# Altium PCB EEG.PcbDoc
Units mil, origin at the board's own origin, x right, y up, seen from the top; angles counter-clockwise.
Board outline 2755.91 x 1771.65 mil, 2 copper layers (Top Layer, Bottom Layer), stack 12.8 mil thick; 57 components, 41 nets, 212 pads, 175 vias.
Unrouted connection lines stored in the file: 37.
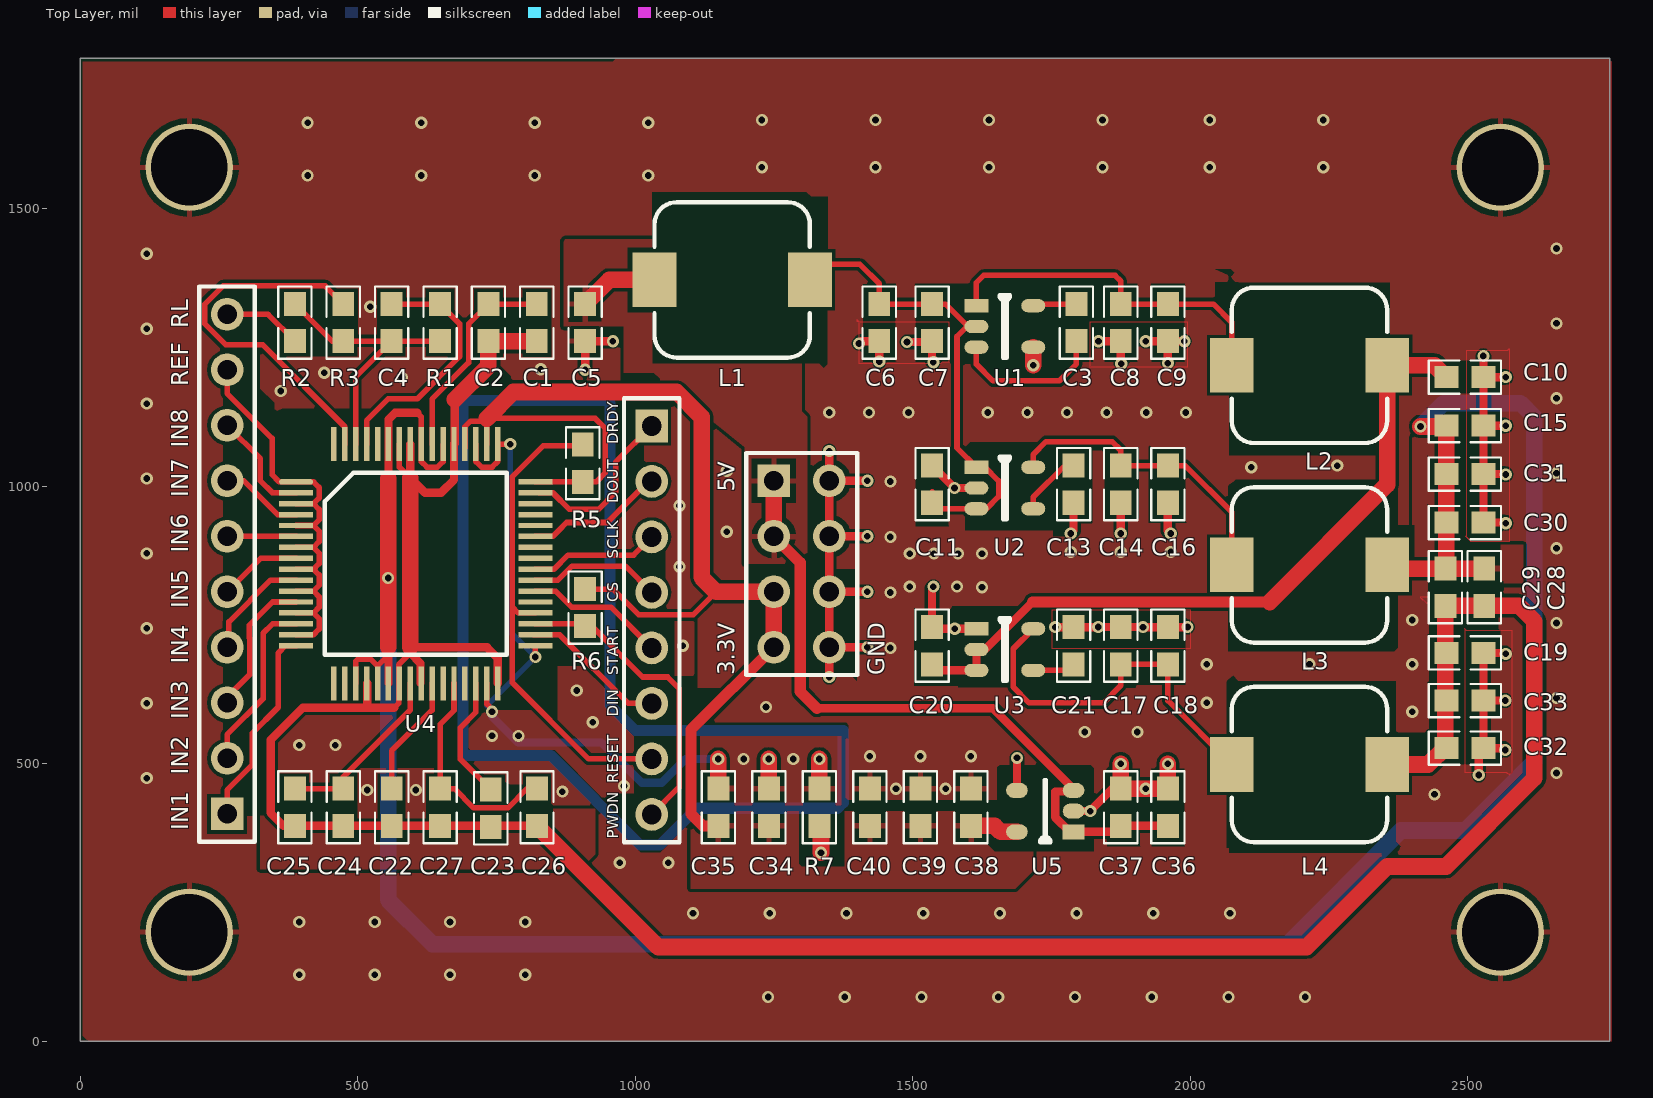
[diagram p0: Top Layer view]
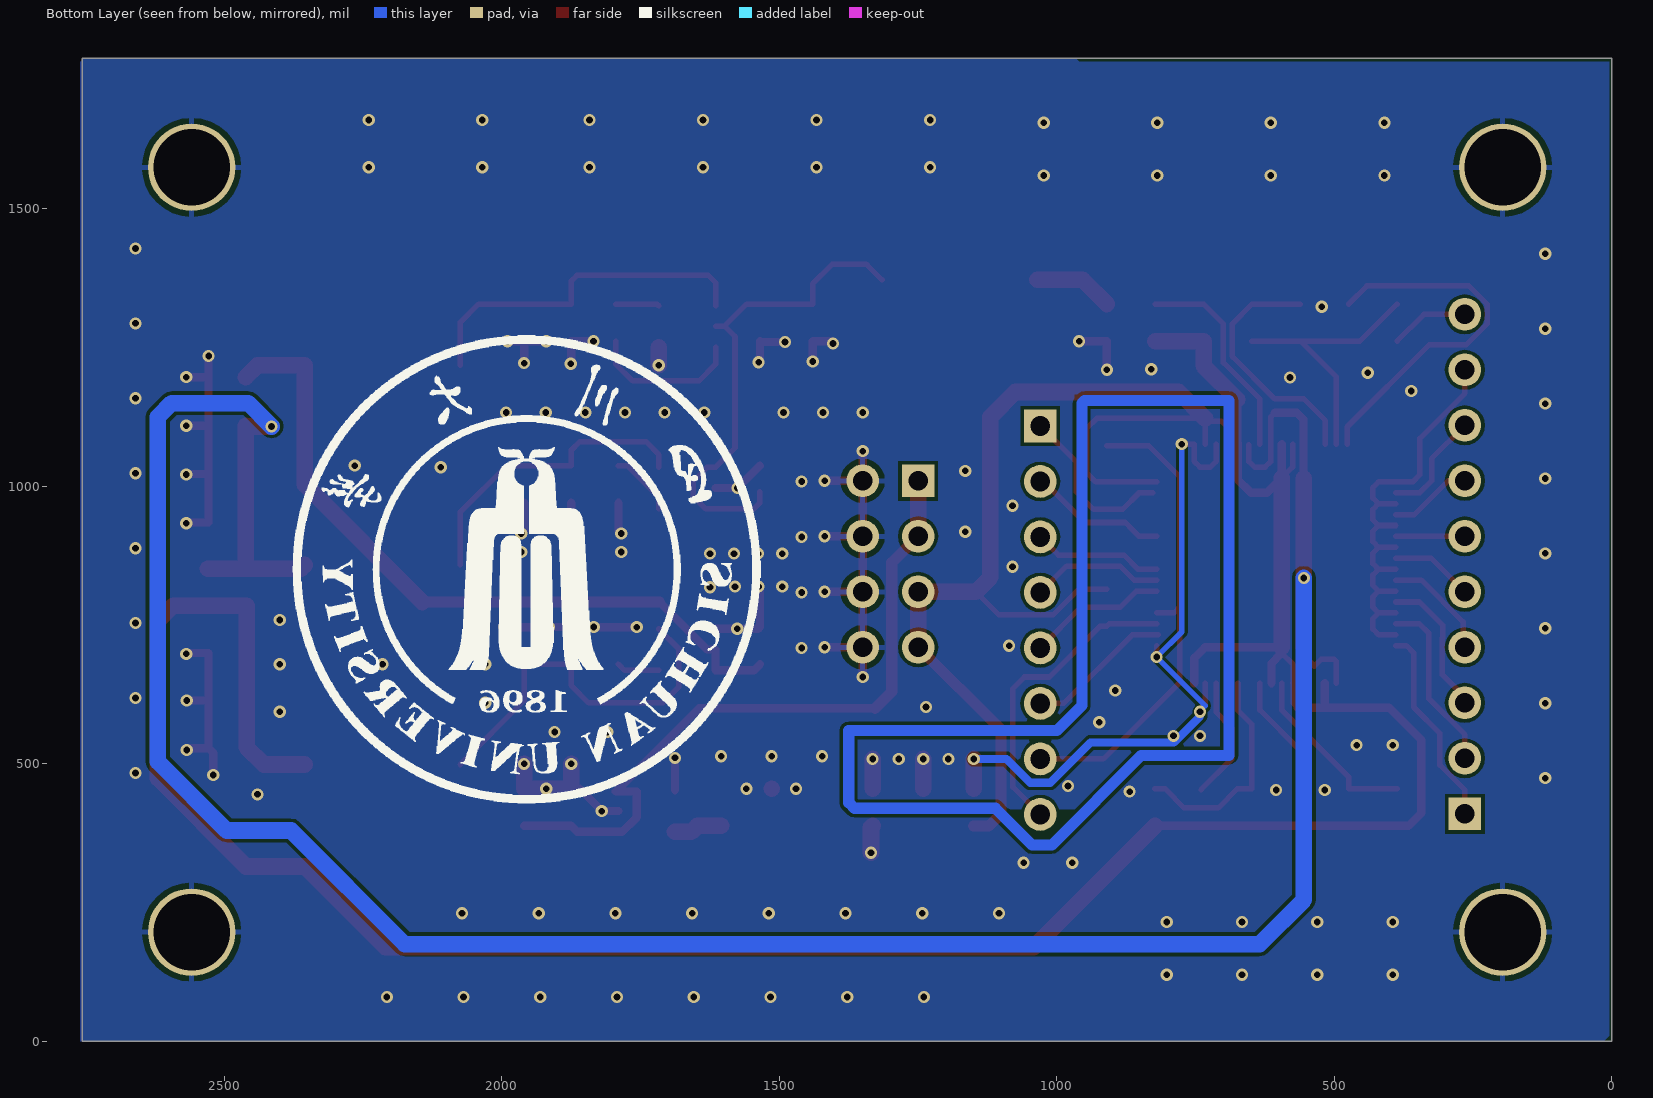
[diagram p1: Bottom Layer view, seen from below]

## Layer stack, top to bottom
Top Solder: solder mask 0.4, Solder Resist, Dk 3.5
Top Layer: signal copper 1.4
Dielectric 1: core 10, FR-4, Dk 4.2
Bottom Layer: signal copper 1.4
Bottom Solder: solder mask 0.4, Solder Resist, Dk 3.5

## Board outline
0,0 2755.91,0 2755.91,1771.65 0,1771.65

## Design rules (kind name [scope] priority, off if disabled: settings)
Clearance [All] p1: gap=6 ignorepadtopadclearanceinfootprint=TRUE
HoleSize [All] p1: absolutevalues=TRUE maxlimit=196.85 minlimit=11.81 maxpercent=80.000 minpercent=20.000
PlaneClearance [All] p1: clearance=8
PlaneConnect [All] p1: planeconnectstyle=Direct reliefexpansion=20 reliefentries=4 reliefconductorwidth=10 reliefairgap=10
PolygonConnect [All] p1: thpad.connectstyle=Relief thpad.reliefconductorwidth=10 thpad.reliefentries=4 thpad.polygonreliefangle="90 Angle" thpad.airgapwidth=10 smdpad.connectstyle=Relief smdpad.reliefconductorwidth=10 smdpad.reliefentries=4 smdpad.polygonreliefangle="90 Angle" smdpad.airgapwidth=10 via.connectstyle=Direct via.reliefconductorwidth=10 via.reliefentries=4 via.polygonreliefangle="90 Angle" via.airgapwidth=10
RoutingVias [All] p1: holewidth=12 width=22 viastyle="Through Hole" minholewidth=12 minwidth=22 maxholewidth=12 maxwidth=22
SilkToSilkClearance [All] p1: silktosilkclearance=6
SilkToSolderMaskClearance [IsPad] p1: minsilkscreentomaskgap=2 clearancetoexposedcopper=TRUE
SolderMaskExpansion [All] p1: expansion=4
Width PWR [InNetClass('PWR')] p1: maxlimit=30 minlimit=10 preferedwidth=15
Width [All] p2: maxlimit=30 minlimit=6 preferedwidth=10
25 further rules are at their usual default settings.

## Classes and differential pairs
net class PWR: +5V -5V AGND AVDD AVSS DGND DVDD
component class EEG: C1 C2 C3 C4 C5 C6 C7 C8 C9 C10 C11 C13 C14 C15 C16 C17 C18 C19 C20 C21 C22 C23 C24 C25 C26 C27 C28 C29 C30 C31 C32 C33 C34 C35 C36 C37 C38 C39 C40 L1 L2 L3 L4 R1 R2 R3 R5 R6 R7 U1 U2 U3 U4 U5

## Components (designator, comment, footprint, x,y, rotation, side; value= is the part's Value field where it differs from the comment)
C1 "Cap" 0603-1 822.84,1295 r90 top value=1u
C2 "Cap" 0603-1 735.69,1295 r90 top value=0.1u
C3 "Cap" 0603-1 1795,1295 r90 top value=1u
C4 "Cap" 0603-1 561.37,1295 r90 top value=0.01u
C5 "Cap Pol1" 0603-1 910,1295 r270 top value=10u
C6 "Cap Pol1" 0603-1 1440,1295 r270 top value=10u
C7 "Cap" 0603-1 1535,1295 r90 top value=1u
C8 "Cap Pol1" 0603-1 1875,1295 r90 top value=10u
C9 "Cap" 0603-1 1960,1295 r90 top value=1u
C10 "Cap Pol1" 0603-1 2495,1196.81 r180 top value=10u
C11 "Cap" 0603-1 1535,1003.95 r270 top value=1u
C13 "Cap" 0603-1 1790,1003.95 r270 top value=1u
C14 "Cap Pol1" 0603-1 1875,1003.95 r270 top value=10u
C15 "Cap Pol1" 0603-1 2495,1109.49 r0 top value=10u
C16 "Cap" 0603-1 1960,1003.95 r90 top value=2.2u
C17 "Cap Pol1" 0603-1 1875,712.9 r270 top value=10u
C18 "Cap" 0603-1 1960,712.9 r270 top value=2.2u
C19 "Cap Pol1" 0603-1 2495,699.84 r180 top value=10u
C20 "Cap Pol1" 0603-1 1535,712.9 r270 top value=10u
C21 "Cap" 0603-1 1790,712.9 r270 top value=0.01u
C22 "Cap" 0603-1 561.54,421.85 r90 top value=1u
C23 "Cap" 0603-1 740,420 r90 top value=1u
C24 "Cap" 0603-1 474.3,421.85 r90 top value=10u
C25 "Cap" 0603-1 387.06,421.85 r90 top value=0.1u
C26 "Cap Pol2" 0603-1 823.25,421.85 r270 top value=100u
C27 "Cap" 0603-1 648.78,421.85 r90 top value=1u
C28 "Cap" 0603-1 2530,818.31 r270 top value=1u
C29 "Cap" 0603-1 2460,818.31 r270 top value=0.1u
C30 "Cap" 0603-1 2495,934.84 r0 top value=10u
C31 "Cap" 0603-1 2495,1022.16 r0 top value=0.1u
C32 "Cap" 0603-1 2495,528.31 r0 top value=10u
C33 "Cap" 0603-1 2495,614.07 r0 top value=0.1u
C34 "Cap" 0603-1 1241,421.85 r90 top value=10u
C35 "Cap" 0603-1 1150,421.85 r90 top value=0.1u
C36 "Cap" 0603-1 1960,421.85 r90 top value=22u
C37 "Cap" 0603-1 1875,421.85 r90 top value=22u
C38 "Cap" 0603-1 1605,421.85 r90 top value=22u
C39 "Cap" 0603-1 1514,421.85 r90 top value=22u
C40 "Cap" 0603-1 1423,421.85 r90 top value=100n
L1 "Inductor" L-SMD-7 1175,1371.97 r0 top value=3.3uH
L2 "Inductor" L-SMD-7 2215,1218.03 r0 top value=3.3uH
L3 "Inductor" L-SMD-7 2215,858.42 r0 top value=3.3uH
L4 "Inductor" L-SMD-7 2215,498.82 r0 top value=3.3uH
P1 "Header 8" HDR1X8 1030,1108.82 r270 top
P2 "Header 10" HDR1X10 265,410 r90 top
P3 "Header 4X2" HDR2X4 1250,1010 r270 top
R1 "Res1" 0603-1 648.53,1295 r90 top value=391k
R2 "Res1" 0603-1 387.06,1295 r90 top value=100k
R3 "Res1" 0603-1 474.22,1295 r90 top value=0
R5 "Res1" 0603-1 905.79,1041.65 r270 top value=10k
R6 "Res1" 0603-1 910,781.54 r270 top value=10k
R7 "Res1" 0603-1 1332,421.85 r270 top value=0
U1 "TPS60403" tps723/732/60403 1615,1325.47 r0 top
U2 "TPS73225" tps723/732/60403 1615,1034.42 r0 top
U3 "TPS72325" tps723/732/60403 1615,743.37 r0 top
U4 "ADS1299" ADS1299 389.29,1008.19 r0 top
U5 "SPX5205" SPX5205 1790,377.52 r180 top

## Footprints (in the part's own frame and the unit in brackets; to place one, negate y for a bottom-side part, rotate by r counter-clockwise, add the part's x,y. Pads: shape width x height; smd on the part's side, far side on the other; paste and mask are expansions set on the pad)
0603-1 [mm]
  rect 1.1x1 smd: 1(-0.85,0) 2(0.85,0)
  silkscreen extent -1.65,-0.76 1.65,0.76, body extent -1.14,-0.38 1.14,0.38, height 1
ADS1299 [mm]
  oval 1.55x0.25 smd: 1(0,0)
  rect 1.55x0.25 smd: 2(0,-0.5) 3(0,-1) 4(0,-1.5) 5(0,-2) 6(0,-2.5) 7(0,-3) 8(0,-3.5) 9(0,-4) 10(0,-4.5) 11(0,-5) 12(0,-5.5) 13(0,-6) 14(0,-6.5) 15(0,-7) 16(0,-7.5) 33(10.95,-7.5) 34(10.95,-7) 35(10.95,-6.5) 36(10.95,-6) 37(10.95,-5.5) 38(10.95,-5) 39(10.95,-4.5) 40(10.95,-4) 41(10.95,-3.5) 42(10.95,-3) 43(10.95,-2.5) 44(10.95,-2) 45(10.95,-1.5) 46(10.95,-1) 47(10.95,-0.5) 48(10.95,0)
  rect 0.25x1.55 smd: 17(1.725,-9.225) 18(2.225,-9.225) 19(2.725,-9.225) 20(3.225,-9.225) 21(3.725,-9.225) 22(4.225,-9.225) 23(4.725,-9.225) 24(5.225,-9.225) 25(5.725,-9.225) 26(6.225,-9.225) 27(6.725,-9.225) 28(7.225,-9.225) 29(7.725,-9.225) 30(8.225,-9.225) 31(8.725,-9.225) 32(9.225,-9.225) 49(9.225,1.725) 50(8.725,1.725) 51(8.225,1.725) 52(7.725,1.725) 53(7.225,1.725) 54(6.725,1.725) 55(6.225,1.725) 56(5.725,1.725) 57(5.225,1.725) 58(4.725,1.725) 59(4.225,1.725) 60(3.725,1.725) 61(3.225,1.725) 62(2.725,1.725) 63(2.225,1.725) 64(1.725,1.725)
  silkscreen extent 1.31,-7.92 9.64,0.42
HDR1X8 [mm] "Connector; Header; 8 Position"
  rect 1.5x1.5 hole 0.9: 1(0,0)
  round 1.5 hole 0.9: 2(2.54,0) 3(5.08,0) 4(7.62,0) 5(10.16,0) 6(12.7,0) 7(15.24,0) 8(17.78,0)
  silkscreen extent -1.27,-1.27 19.05,1.27
HDR1X10 [mm] "Connector; Header; 10 Position"
  rect 1.5x1.5 hole 0.9: 1(0,0)
  round 1.5 hole 0.9: 2(2.54,0) 3(5.08,0) 4(7.62,0) 5(10.16,0) 6(12.7,0) 7(15.24,0) 8(17.78,0) 9(20.32,0) 10(22.86,0)
  silkscreen extent -1.27,-1.27 24.13,1.27
HDR2X4 [mm] "Connector; Header; 4x2 Position"
  rect 1.5x1.5 hole 0.9: 1(0,0)
  round 1.5 hole 0.9: 2(0,2.54) 3(2.54,0) 4(2.54,2.54) 5(5.08,0) 6(5.08,2.54) 7(7.62,0) 8(7.62,2.54)
  silkscreen extent -1.27,-1.27 8.89,3.81
L-SMD-7 [mm] "贴片电感7*7"
  rect 2x2.5 smd: 1(-3.556,0) 2(3.556,0)
  silkscreen extent -3.56,-3.56 3.56,3.56, body extent -3.56,-3.56 3.56,3.56, height 4
SPX5205 [mm]
  rect 0.99x0.69 smd: 1(0,0)
  oval 0.99x0.69 smd: 2(0,-0.95) 3(0,-1.9) 4(2.59,-1.9) 5(2.59,0)
  silkscreen extent 1.06,-2.37 1.53,0.48
tps723/732/60403 [mm]
  rect 1.1x0.6 smd: 1(0,0)
  oval 1.1x0.6 smd: 2(0,-0.95) 3(0,-1.9) 4(2.6,-1.9) 5(2.6,0)
  silkscreen extent 1.06,-2.37 1.54,0.48

## Part data
C1 C2 C3 C4 C7 C9 C11 C13 C16 C18 C21 C22 C23 C24 C25 C27 C28 C29 C30 C31 C32 C33 C34 C35 C36 C37 C38 C39 C40: "Capacitor", LatestRevisionDate=17-Jul-2002, LatestRevisionNote="Re-released for DXP Platform.", PackageDescription="Radial Cap, Thru-Hole; 2 Leads; 0.3 in Pin Spacing", PackageReference=RAD-0.3, Published=8-Jun-2000, Publisher="Altium Limited"
C5 C6 C8 C10 C14 C15 C17 C19 C20: "Polarized Capacitor (Radial)", LatestRevisionDate=17-Jul-2002, LatestRevisionNote="Re-released for DXP Platform.", PackageDescription="Polarized Capacitor (Radial); 2 Leads", PackageReference=RB7.6-15, Published=8-Jun-2000, Publisher="Altium Limited"
C26: "Polarized Capacitor (Axial)", LatestRevisionDate=17-Jul-2002, LatestRevisionNote="Re-released for DXP Platform.", PackageDescription="Polarized Capacitor; 2 Leads", PackageReference=POLAR0.8, Published=8-Jun-2000, Publisher="Altium Limited"
P1: "Header, 8-Pin", LatestRevisionDate=17-Jul-2002, LatestRevisionNote="Re-released for DXP Platform.", Publisher="Altium Limited"
P2: "Header, 10-Pin", LatestRevisionDate=17-Jul-2002, LatestRevisionNote="Re-released for DXP Platform.", Publisher="Altium Limited"
P3: "Header, 4-Pin, Dual row", LatestRevisionDate=17-Jul-2002, LatestRevisionNote="Re-released for DXP Platform.", Publisher="Altium Limited"
R1 R2 R3 R5 R6 R7: "Resistor", LatestRevisionDate=17-Jul-2002, LatestRevisionNote="Re-released for DXP Platform.", PackageDescription="Axial Device, Thru-Hole; 2 Leads; 0.3 in Pin Spacing", PackageReference=AXIAL-0.3, Published=8-Jun-2000, Publisher="Altium Limited"
L1 L2 L3 L4: Code_IEC=1005, Code_JEITA=0402, LatestRevisionDate=29-May-2009, LatestRevisionNote="IPC-7351 Footprint Added.", PackageDescription="Chip Inductor", PackageReference=0402-A, Published=8-Jun-2000, Publisher="Altium Limited"

## Free pads (board coordinates)
  round 157.48 hole 137.8: 3(196.85,1574.8) 4(196.85,196.85) 5(2559.06,196.85) 6(2559.06,1574.8)

## Via types
v1: diameter 22, hole 12, Top Layer to Bottom Layer, tented both sides, 175 vias

## Nets (pads, with @x,y where several pads share a name; then routed paths per layer and width w, separated by ;. In a path a pad name is that pad's centre, name@x,y a point inside that pad or via, vN(x,y) a via of type N, cw(c..) or ccw(c..) an arc to the next point about the centre after c; other vN are vias at no path point)
+5V: C5.1 C36.1 C37.1 L1.1 P3.1 P3.3 U5.1 U5.3 | length 1416.9
  Top Layer w15: 1327.58,600 1645,600 1794.69,450.31 1757.01,450.31 1757.01,403.7 1783.2,377.52 U5.1 1864.13,377.52 C37.1 C36.1
  Top Layer w20: P3.3 1297.5,862.5 1297.5,630.08 1327.58,600
  Top Layer w30: C5.1 953.5,1371.97 L1.1 ; P3.3 P3.1
-5V: C10.2 C20.2 L2.2 U3.2 U3.3 | length 1315.2
  Top Layer w15: C20.2 1545.87,668.57 U3.3 U3.2 1630.15,705.97 1715.84,791.65
  Top Layer w20: 1715.84,791.65 2143.46,791.65
  Top Layer w30: 2143.46,791.65 2355,1003.19 L2.2 2440.31,1218.03 C10.2
AGND: C5.2 C6.2 C7.1 C8.1 C9.1 C10.1 C11.1 C13.2 C14.2 C15.2 C16.1 C17.1 C18.1 C19.1 C20.1 C21.1 C30.2 C31.2 C32.2 C33.2 C36.2 C37.2 C38.2 C39.2 C40.2 P3.2 P3.4 P3.6 P3.8 pad.3 pad.4 pad.5 pad.6 R7.2 U1.4 U2.2 U3.1 U5.2 U5.4 | length 3016.5
  Top Layer w15: v1(910,1210) C5.2 v1(960,1261.54) ; v1(1350,656.5) P3.8 ; v1(1350,1063.5) P3.2 ; v1(1403.5,1257.53) 1407.51,1261.54 C6.2 v1(1440,1225) ; v1(1418.5,710) P3.8 ; v1(1418.5,810) P3.6 ; v1(1418.5,910) P3.4 ; v1(1418.5,1010) P3.2 ; v1(1490,1260.2) 1533.66,1260.2 C7.1 1535,1226.09 v1(1537.5,1223.59) ; C11.1 v1(1575.39,997.02) U2.2 ; v1(1537.5,819.31) 1535,816.81 C20.1 1537.99,743.37 v1(1575.9,743.37) U3.1 ; U5.4 v1(1688.03,510.74) ; v1(1757.01,746.36) C21.1 1834.18,746.36 v1(1834.31,746.49) 1914.87,746.49 v1(1915,746.36) C18.1 1995.22,746.36 v1(1995.35,746.49) ; v1(1785,915) 1790,920 C13.2 ; U5.2 v1(1819.92,414.92) 1860.32,455.32 C37.2 ; v1(1835,1261.54) C8.1 1875,1221.67 v1(1875.89,1220.77) ; v1(1875,915) C14.2 ; v1(1920,1261.54) C9.1 ; C16.1 1960,920 v1(1965,915) ; v1(1960,1222.11) C9.1 ; v1(1989.68,1261.54) C9.1 ; v1(2520,480) 2520,519.84 C32.2 ; v1(2528.46,1235) C10.1 ; v1(2567.9,525) 2564.59,528.31 C32.2 ; v1(2567.9,614.19) 2567.78,614.07 C33.2 ; v1(2568.71,698.2) 2567.06,699.84 C19.1 C33.2 ; v1(2568.71,933.67) 2567.54,934.84 C30.2 C31.2 ; v1(2568.71,1021.38) 2567.93,1022.16 C31.2 ; v1(2568.71,1109.1) 2568.32,1109.49 C15.2 ; v1(2568.71,1196.81) C10.1 ; P3.8 P3.6 ; P3.6 P3.4 ; P3.4 P3.2 ; C32.2 C33.2 ; C31.2 C15.2 ; C15.2 C10.1
  Top Layer w30: R7.2 1335,385.39 v1(1335,340) ; v1(1717.36,1218.03) U1.4 ; v1(1875,500) C37.2 C36.2 v1(1960,500)
  other v1: 1239.68,80 1377.91,80 1516.13,80 1654.35,80 1792.58,80 1930.8,80 2069.03,80 2207.25,80 395,120 530.75,120 666.5,120 802.25,120 395,215 530.75,215 666.5,215 802.25,215 1104.42,230.97 1242.65,230.97 1380.87,230.97 1519.09,230.97 1657.32,230.97 1795.54,230.97 1933.77,230.97 2071.99,230.97 972.19,321.65 1060,321.65 2440.31,445 868.97,450 517.52,452.9 605,452.9 1470,455.32 1559.5,455.31 1920,455.32 120,474.33 2660,483.68 1423,513.73 1514,513.73 1605,513.73 395,533.82 460,533.82 1810,557.36 1905,557.36 2400.37,593.74 1236,602.36 120,609.28 2030,610.09 2660,618.67 2030,679.44 2215.19,679.44 2400.37,679.44 1460,708.82 1086.09,712.91 120,744.23 2660,753.67 2400.37,759.16 1460,808.82 1625,818.09 1495,819.31 1580,819.31 1080,855 120,879.18 1495,878.78 1538.33,878.78 1581.67,878.78 1625,878.78 1785,881.81 1875,881.81 1965,881.81 2660,888.66 1460,908.82 1165,918.09 1080,965 1460,1008.82 120,1014.13 2660,1023.65 1165,1027.92 2110,1034.42 2265,1037.41 1350,1132.93 1421.37,1132.93 1492.74,1132.93 1635.49,1132.93 1706.86,1132.93 1778.23,1132.93 1849.6,1132.93 1920.97,1132.93 1992.34,1132.93 120,1149.08 2660,1158.65 361.38,1171.69 580,1196.24 440,1204.73 830,1210.87 120,1284.03 2660,1293.64 522.83,1323.46 120,1418.97 2660,1428.64 410,1560 614.61,1560 819.22,1560 1023.82,1560 1228.43,1574.8 1433.04,1574.8 1637.65,1574.8 1842.25,1574.8 2035.39,1574.8 2240,1574.8 410,1655 614.61,1655 819.22,1655 1023.82,1655 1228.43,1660 1433.04,1660 1637.65,1660 1842.25,1660 2035.39,1660 2240,1660
AVDD: C15.1 C28.1 C29.1 C30.1 C31.1 L3.2 U4.19 U4.21 U4.22 U4.54 U4.56 U4.59 | length 5010.1
  Top Layer w10: U4.19 496.58,684.52 500.68,688.63 523.62,688.63 536.02,676.22 554.8,695 554.8,709.17 ; 607.5,1132.5 614.69,1125.31 U4.56 614.76,1076.02 614.76,1044.72 624.89,1034.59 643.85,1034.59 653.98,1044.72 U4.54@653.98,1074.84
  Top Layer w15: U4.22 555.55,695 ; 555.63,1015 U4.59 555.63,1120.63 567.5,1132.5 607.5,1132.5 ; 2415,851.77 C29.1
  Top Layer w20: 554.8,709.17 555.55,709.92 ; 555.55,1014.92 555.63,1015
  Top Layer w30: 555.55,709.92 555.55,1014.92 ; L3.2 2361.65,851.77 2415,851.77 C28.1 ; v1(2415.01,1107.95) 2460,1107.95 C15.1 C31.1 C30.1 2461.54,853.31 C29.1
  Bottom Layer w30: v1(555,835) 555,255 635,175 2175,175 2380,380 2496,380 2620,504 2620,1125 2595,1150 2457.06,1150 v1(2415.01,1107.95)
AVSS: C1.1 C2.1 C19.2 C22.1 C23.1 C24.1 C25.1 C26.2 C27.1 C28.2 C29.2 C32.1 C33.1 L4.2 U4.20 U4.23 U4.25 U4.32 U4.53 U4.57 U4.58 | length 5039.5
  Top Layer w10: 566.14,600.99 574.05,608.9 U4.23@574.05,643.74 ; U4.23 U4.23@574.05,643.74 ; U4.58 575.32,1034.68 595,1015 ; 595,699.52 574.05,678.58 U4.23@574.05,643.74
  Top Layer w15: 517.52,608.9 U4.20@517.52,645 ; 566.14,600.99 400.99,600.99 343.34,543.34 343.34,411.66 366.61,388.39 C25.1 C24.1 C22.1 C27.1 C26.2 ; U4.57 595,1015 621.5,988.5 650.52,988.5 673.74,1011.72 U4.53 ; U4.25@613.5,645 613.5,681.02 595,699.52 595,710 733.52,710 752.48,691.04 U4.32 ; U4.53@673.74,1077.37 U4.53 ; 675,1156.37 675,1077.37 U4.53
  Top Layer w30: 595,710 595,1015 ; 675,1156.37 735.69,1217.05 C2.1 C1.1 ; C26.2 1041.64,170 2210,170 2355,315 2460.96,315 2620,474.04 2620,757.18 2592.33,784.84 C28.2 C29.2 2460,699.84 2460,529.84 2428.98,498.82 L4.2
C\S\: P1.4 U4.39 | length 239.8
  Top Layer w10: U4.39 861.02,831.02 886.32,856.32 982.49,856.32 P1.4
D\R\D\Y\: P1.1 U4.47 | length 309.1
  Top Layer w10: U4.47@827.1,988.5 851.7,988.5 881.59,958.61 933.73,958.61 965,989.88 965,1043.82 P1.1
DGND: C34.2 C35.2 R7.1 U4.31 U4.33 U4.49 U4.51 | length 1393.9
  Top Layer w10: U4.51 713.11,1044.8 723.32,1034.59 742.27,1034.59 752.48,1044.8 U4.49 v1(775,1076.1) ; U4.31 732.87,644.92 732.87,607.74 732.8,607.66 742.27,598.18 v1(742.27,593.74) ; v1(820.39,692.45) U4.33
  Top Layer w30: C35.2 v1(1150,508.82) ; C34.2 v1(1241,508.82) ; R7.1 v1(1332,508.82)
  Bottom Layer w10: v1(742.27,593.74) 742.27,595.37 732.8,604.85 v1(820.39,692.45) 775,737.84 v1(775,1076.1)
  Bottom Layer w15: v1(742.27,593.74) 742.27,585.52 789.3,538.5 939.47,538.5 1012.18,465.79 1047.82,465.79 1090.85,508.82 v1(1150,508.82)
  other v1: 980,460 1195.49,508.82 1285,508.82 742.27,550.35 790,550.35 923.76,575 895,632.12
DIN: P1.6 U4.34 | length 263.7
  Top Layer w10: U4.34@817.53,732.52 864.19,732.52 987.9,608.82 P1.6
DOUT: P1.2 U4.43 | length 248.8
  Top Layer w10: U4.43 851.7,909.76 861.91,919.97 876.78,934.84 949.84,934.84 P1.2@1026.91,1011.91
DVDD: C34.1 C35.1 C38.1 C39.1 C40.1 P3.5 P3.7 R5.2 R6.1 U4.48 U4.50 U4.52 U5.5 | length 2298.6
  Top Layer w10: U4.52@693.5,1069.7 693.5,1107.49 703.63,1117.61 728.04,1117.61 732.8,1122.37 ; U4.50 732.8,1122.37 ; U4.48 R5.2 930,1008.19 946.45,1024.63 946.45,1104.18 928.26,1122.37 732.8,1122.37 ; R6.1 960,815 1006.71,768.29 1104.42,768.29 1146.13,810
  Top Layer w20: C35.1 1122.1,388.39 1101,409.48 1101,561.51 P3.7@1250,710.51
  Top Layer w30: 732.8,1122.37 780.43,1170 1075,1170 1120,1125 1120,836.13 1146.13,810 P3.5 P3.7@1250,710.51 ; C38.1 1647.73,388.39 1658.6,377.52 U5.5
NetC1_2: C1.2 C2.2 U4.55 | length 381.5
  Top Layer w10: U4.55 634.37,1157.26 700,1222.89 700,1292.78 C2.2 C1.2
NetC3_1: C3.1 U1.3 | length 276.6
  Top Layer w10: U1.3 1615,1220 1645,1190 1764.23,1190 1795,1220.77 C3.1
NetC3_2: C3.2 U1.5 | length 78.9
  Top Layer w10: U1.5 1720.35,1328.46 C3.2
NetC4_1: C4.1 R1.1 R2.2 R3.1 U4.62 | length 501.5
  Top Layer w10: R2.2 453.99,1261.54 474.3,1261.54 C4.1 ; U4.62 496.58,1196.74 C4.1 ; R1.1 C4.1
NetC4_2: C4.2 R1.2 U4.61 | length 454.4
  Top Layer w10: U4.61 516.26,1118.61 555.15,1157.5 607.5,1157.5 684,1234 684,1292.99 R1.2 C4.2
NetC6_1: C6.1 C7.2 C11.2 L1.2 U1.2 U2.1 U2.3 | length 888
  Top Layer w10: L1.2 1343.03,1400 1405,1400 1440,1365 C6.1 C7.2 1559.17,1328.46 U1.2@1599.56,1288.07 ; C11.2@1535,989.86 C11.2 1545.87,959.62 U2.3 1633.06,959.62 1655,981.56 1655,1010 1630.58,1034.42 U2.1 1580,1069.42 1580,1270 1598.07,1288.07 U1.2@1599.56,1288.07 ; U1.2 U1.2@1599.56,1288.07
NetC8_2: C8.2 C9.2 L2.1 U1.1 | length 643.7
  Top Layer w10: U1.1 1615,1366.97 1628.03,1380 1865,1380 1875,1370 C8.2 C9.2 2042.01,1328.46 2075,1295.47 L2.1
NetC13_1: C13.1 U2.4 | length 117.1
  Top Layer w10: U2.4 1717.36,980.55 1774.23,1037.42 C13.1
NetC14_1: C14.1 C16.2 L3.1 U2.5 | length 554
  Top Layer w10: U2.5 1717.36,1057.36 1740.46,1080.46 1859.54,1080.46 1875,1065 C14.1 C16.2 1991.18,1037.41 2075,953.59 L3.1
NetC17_2: C17.2 C18.2 L4.1 U3.5 | length 689.5
  Top Layer w10: U3.5 1681.4,707.41 1681.4,638.6 1710,610 1843.82,610 1875,641.18 C17.2 C18.2 1960,613.82 L4.1
NetC21_2: C21.2 U3.4 | length 77.1
  Top Layer w10: U3.4 1779.13,668.57 C21.2
NetC22_2: C22.2 U4.26 | length 219.9
  Top Layer w10: C22.2 561.54,524.04 634.37,596.87 U4.26
NetC23_2: C23.2 U4.30 | length 226
  Top Layer w10: U4.30 713.11,593.11 685,565 685,508.47 C23.2
NetC24_2: C24.2 C25.2 U4.24 | length 326.9
  Top Layer w10: C25.2 C24.2 474.3,476.8 595,597.5 U4.24
NetC26_1: C26.1 C27.2 U4.28 | length 403.1
  Top Layer w10: U4.28 673.74,596.23 648.78,571.26 C27.2 674.68,455.32 709.19,420.81 770.81,420.81 805.32,455.32 C26.1
NetP2_1: P2.1 U4.16 | length 365.5
  Top Layer w10: P2.1 265,452.69 310,497.69 310,555 357,602 357,699.52 370.39,712.91 U4.16
NetP2_2: P2.2 U4.14 | length 318.7
  Top Layer w10: P2.2 265,552.69 330,617.69 330,735.5 346.79,752.28 U4.14
NetP2_3: P2.3 U4.12 | length 258.5
  Top Layer w10: P2.3 265,620 305.53,660.53 305.53,726.79 305,727.31 305,749.87 346.79,791.65 U4.12
NetP2_4: P2.4 U4.10 | length 201.3
  Top Layer w10: P2.4 268.27,710 268.27,755.95 343.34,831.02 U4.10
NetP2_5: P2.5 U4.8 | length 149.3
  Top Layer w10: P2.5 325.39,870.39 U4.8
NetP2_6: P2.6 U4.6 | length 124.4
  Top Layer w10: P2.6 389.06,910 U4.6
NetP2_7: P2.7 U4.4 | length 149.5
  Top Layer w10: P2.7 295,1010 355.87,949.13 U4.4
NetP2_8: P2.8 U4.2 | length 198
  Top Layer w10: P2.8 325,1050 325,1010 346.5,988.5 U4.2
NetP2_9: P2.9 U4.1 U4.3 U4.5 U4.7 U4.9 U4.11 U4.13 U4.15 | length 856.4
  Top Layer w10: P2.9 265,1167.31 346,1086.31 346,1021 358.81,1008.19 U4.1 420.6,1008.19 430.8,997.98 430.8,979.03 420.6,968.82 ; U4.15 420.6,732.6 430.8,742.81 430.8,761.76 420.6,771.97 ; U4.13 420.6,771.97 ; U4.11 420.6,811.34 ; U4.9 420.6,850.71 ; U4.7 420.6,890.08 ; U4.5 420.6,929.45 ; U4.3 420.6,968.82 ; 420.6,771.97 430.8,782.18 430.8,801.13 420.6,811.34 ; 420.6,811.34 430.8,821.55 430.8,840.5 420.6,850.71 ; 420.6,850.71 430.8,860.92 430.8,879.87 420.6,890.08 ; 420.6,890.08 430.8,900.29 430.8,919.24 420.6,929.45 ; 420.6,929.45 430.8,939.66 430.8,958.61 420.6,968.82
NetR3_2: R3.2 U4.63 | length 672.5
  Top Layer w10: R3.2 441.56,1361.12 257.6,1361.12 224.47,1327.99 224.47,1293.21 262.69,1255 329.3,1255 476.89,1107.41 U4.63
P\W\D\N\: P1.8 R6.2 U4.35 | length 554.5
  Top Layer w10: U4.35 905.79,752.28 R6.2 921.93,748.07 1013.49,656.51 1058.49,656.51 1079.29,635.71 1079.29,458.11 P1.8
R\E\S\E\T\: P1.7 R5.1 U4.36 | length 879.5
  Top Layer w10: U4.36 789.09,771.97 778.88,782.18 ; R5.1@910,1073.46 834.68,1073.46 778.88,1017.67 778.88,782.18 ; P1.7 916.18,508.82 778.88,646.12 778.88,782.18
RL: P2.10 R2.1 | length 142.1
  Top Layer w10: P2.10 338.6,1310 R2.1
SCLK: P1.3 U4.40 | length 233.7
  Top Layer w10: U4.40 853.9,850.71 879.19,876 997.18,876 P1.3
START: P1.5 U4.38 | length 252.1
  Top Layer w10: U4.38 856.77,811.34 885.76,782.35 956.47,782.35 P1.5
pads on no net: U4.17 U4.18 U4.27 U4.29 U4.37 U4.41 U4.42 U4.44 U4.45 U4.46 U4.60 U4.64
copper on no net: | length 2803.8
  Bottom Layer w20: 690,515 848.32,515 1009.17,354.15 1045,354.15 1110.85,420 1365,420 1375,430 1375,560 1000,560 955,605 955,1150 950,1155 855,1155 690,1155 690,525 690,515

## Polygon pours and split planes (outlines as drawn)
AGND on Bottom Layer "Bottom Layer-AGND" (solid, pour order 8): 5,10 15,0 2760,0 2760,1765 2755,1770 2150,1165 967.57,1165 967.57,612.43 1002.44,577.56 1002.44,575 1380,575 1385,570 1385,425 1370,410 1113.88,410 1045,340 1010,340 845,505 680,505 680,1165 2150,1165 2755,1770 965,1770 960,1765 5,1765
DGND on Bottom Layer "Bottom Layer-DGND" (solid, pour order 48): 700,1145 700.83,1145.83 945,1145.83 945,600.73 946.91,600.73 997.64,550 1365,550 1365,430 1110,430 1045,365 1015,365 855,525 702.92,525 700,527.92
no net on Bottom Layer "Bottom Layer-No Net" (solid, pour order 0): 120,1715
DGND on Top Layer "Top Layer-DGND" (solid, pour order 56): 700,1145 700.83,1145.83 945,1145.83 945,600.73 946.91,600.73 997.64,550 1371.41,550 1371.41,430 1110,430 1045,365 1015,365 855,525 702.92,525 700,527.92
AGND on Top Layer "Bottom Layer-AGND" (solid, pour order 72): 5,10 15,0 2760,0 2760,1765 2755,1770 2150,1165 967.57,1165 967.57,612.43 1002.44,577.56 1002.44,575 1380,575 1385,570 1385,425 1370,410 1113.88,410 1045,340 1010,340 845,505 680,505 680,1165 2150,1165 2755,1770 965,1770 960,1765 5,1765
AGND on Top Layer "Top Layer-AGND" (solid, pour order 14): 1315,1130 1325,1120 1325,625 1320,620 1325.93,614.07 1460,614.07 1460,680 1503.86,723.86 1645,723.86 1645,920 1483.91,920 1475,928.91 1475,1010 1569.87,1010 1575.39,1015.53 1565,1025.92 1565,1135 1320,1135
DVDD on Top Layer "Top Layer-DVDD 1" (solid, pour order 30): 1112.22,415 1295,414.92 1295,320 1300,315 1378.19,315 1378.19,423.19 1378.19,415 1390,415 1717.36,415 1717.36,307.36 1685,275 1100,275 1100,402.78
DVDD on Top Layer "Top Layer-DVDD" (solid, pour order 22): 1113.02,858.42 1286.58,858.42 1295,850 1290,845 1290,636.71 1113.02,636.71
AVDD on Top Layer "Top Layer-AVDD" (solid, pour order 38): 2300,788.59 2405,788.59 2417.23,807.23 2426.18,825 2600,825 2600,895 2490,895 2490,1155 2400,1155 2400,929.45 2395,924.45 2300,924.45 2300,801.81
AGND on Top Layer "Top Layer-AGND 6" (solid, pour order 34): 2495,485 2570,485 2575,480 2580,485 2580,740 2498.37,740 2495,743.37
+5V on Top Layer "Top Layer-+5V" (solid, pour order 20): 871.46,1440 871.46,1288.07 980,1288.07 980,1236.28 980,1205 1052.67,1187.67 1197.44,1070.12 1197.44,860.92 1310,860.92 1310,1125 1300,1135 1300,1229.88 1080,1224.77 1080,1445 870,1445
AVSS on Top Layer "Top Layer-AVSS 1" (solid, pour order 44): 329.3,420.81 325,416.52 325,310 900.73,310 928.26,337.53 928.26,419.1 331.01,419.1
no net on Top Layer "Top Layer-No Net 3" (solid, pour order 74): 2414.69,800.53 2425.37,789.84 2430.31,789.84 2430.31,799.93 2429.98,800.27 2417.23,800.27
AGND on Top Layer "Top Layer-AGND 5" (solid, pour order 40): 2496.77,909.76 2498.37,911.37 2498.37,1245 2572.5,1245 2575,1247.5 2575,900 2506.23,900 2497.41,908.82
AGND on Top Layer "Top Layer-AGND 4" (solid, pour order 62): 1751.69,778 2000.1,778 2000.1,707.41 1751.69,707.41
AGND on Top Layer "Top Layer-AGND 1" (solid, pour order 68): 1394.21,545 1672.93,545 1720.35,497.57 1720.35,424.79 1379.79,424.79 1379.99,545
AGND on Top Layer "Top Layer-AGND 2" (solid, pour order 66): 1834.31,1296.49 1845.97,1296.81 1995,1296.81 1995,1215 1989.68,1215 1977.99,1215 1820,1215 1820,1296.49
AGND on Top Layer "Top Layer-AGND 3" (solid, pour order 64): 1400,1300 1403.19,1296.81 1565,1296.81 1565,1223.59 1553.72,1223.59 1550.77,1220.64 1403.5,1220.64 1403.5,1294.42 1400,1297.92
no net on Top Layer "Top Layer-No Net" (solid, pour order 50): 700,1145
no net on Top Layer "Top Layer-No Net 1" (solid, pour order 42): 335,386.54
AGND on Top Layer "Top Layer-AGND 7" (solid, pour order 32): 1995.35,1001.81 1995.35,865.54 1755,865.54 1755,1001.81
DGND on Top Layer "Top Layer-DGND 1" (solid, pour order 24): 1110,510 1110,430 1115,425 1371.41,425 1371.41,513.73 1345.14,540 1110,540 1109.01,539.01 1109.01,510
no net on Top Layer "Top Layer-No Net 2" (solid, pour order 16): 1322.5,870.39

## Other copper
Top Layer:
  pour cut-out: 881.42,923.63 879.19,921.4 879.19,887.21 874.54,887.21 865.53,878.2 864.75,878.97 860,878.97 860,902.2 860.91,903.11
  pour cut-out: 769.68,463.37 769.81,463.25 797.38,463.25 770.68,436.55 768.61,438.62 765.68,438.62 765.68,461 769.68,465
  pour cut-out: 1055.34,883.48 1055.34,834.16 1020.52,834.16 996.97,857.71 996.97,864.78 1001.83,864.78 1014.02,876.98
  pour cut-out: 412.75,1280.38 412.75,1233.88 448.53,1233.88 446.06,1236.36 446.06,1253.6 417.37,1282.3
  pour cut-out: 253.78,445.53 257.6,449.34 257.6,1323.46 342.28,1323.46 364.93,1300.81 324.65,1260.53 324.65,1175.92 350.36,1150.22 350.36,662.82 354.07,659.11 330.62,635.67 330.62,406.39 268.61,406.39 265,410
  pour cut-out: 294.31,665.17
  pour cut-out: 1377.91,435 1655,435 1651.27,431.27 1651.27,412.7 1648.37,409.8 1630.69,409.8 1630.69,416.04 1584.21,416.04 1581.15,419.1 1378.19,419.1
  pour cut-out: 1634.69,364.99 1638.52,364.99 1639.69,366.15 1642.68,366.15 1651.27,357.56 1651.27,351.66 1644.62,345 1634.69,354.93
  pour cut-out: 1071.75,659.11 1105,659.11 1105,635.55 1110.33,630.22 1140.1,630.22 1140.1,620.15 1095.51,575.56 1090.51,580.56 1090.51,639.15 1089.65,640
  pour cut-out: 1127.93,630.67 1122.87,625.6 1123.97,625.6 1128.59,630.22
  pour cut-out: 1085,651.78 1085.55,651.23 1108.43,651.23 1108.43,632.12 1114.95,625.6 1142.02,625.6 1142.02,622.06 1095.51,575.56 1090.51,580.56 1090.51,636.97 1079.29,648.19
  pour cut-out: 997.64,550 997.64,444.13 996.19,442.68 998.87,440 1071.75,440 1071.75,552.21 1066.98,556.98
  pour cut-out: 945,438.62 953.12,446.74 1086.71,446.74 1088.78,444.67 1088.78,408.78 1045,365 1015,365
  pour cut-out: 860.91,596.23 849.79,596.23 849.25,595.69 849.25,589.33 861.02,577.56
  pour cut-out: 860.91,713.41 861.02,713.3 861.02,676.22 903.73,676.22 865.53,714.43 865.53,715.33
  pour cut-out: 2374.78,803.21 2400.37,803.21 2400.37,830.36 2428.03,830.36 2428.03,804.37 2429.88,802.52 2429.88,639.91 2439.67,639.91 2440,640.24 2438.59,641.65 2438.59,757.19 2434.31,757.19 2434.31,804.37 2428.03,804.37 2428.03,830.36 2400.37,830.36
  pour cut-out: 2371.34,554.03 2374.67,557.36 2429.88,557.36 2429.88,584.39 2438.59,584.39 2438.59,560.49 2429.88,551.78 2429.88,530 2423.71,530 2413.94,520.23 2400.37,520.23 2400.37,554.03
  pour cut-out: 2042.01,1339.68 2045,1342.67 2045,1367.86 2087.09,1367.86
  pour cut-out: 2374.78,930.95 2403.42,930.95 2404.37,930 2404.37,915 2377.42,915 2374.78,917.64
  pour cut-out: 2482.95,905.16 2485.69,902.42 2485.69,873.18 2555.69,873.18 2560.12,877.61 2560.12,905.16
  pour cut-out: 2503,820.68 2503,807.23 2559.24,807.23 2565,812.99 2565,830.36 2512.69,830.36
  pour cut-out: 2485.69,763.43 2481.41,759.16 2481.41,729.53 2491.49,729.53 2491.49,738.51 2559.47,738.51 2560.12,739.15 2555.69,743.59 2555.69,757.19 2510.56,757.19 2504.31,763.43
  pour cut-out: 2489.69,820 2489.69,789.84 2500.31,789.84 2500.31,816.5 2496.81,820
  pour cut-out: 2505,805.42
  pour cut-out: 2489.69,819.63 2489.69,789.84 2500.31,789.84 2496.77,793.39 2496.77,820
  pour cut-out: 2491.49,738.51 2491.49,729.53 2560.12,729.53 2560.12,739.15 2560.96,740
  pour cut-out: 713.33,1163.02 757.59,1163.02 774.93,1180.36 776.13,1180.36 776.13,1198.02 757.1,1217.05 723.32,1183.27 723.32,1176.19
  pour cut-out: 973.51,1215.71 973.51,1171.49 975,1170 1045,1170 1045,1193.66 1033.66,1205 980,1205
  pour cut-out: 965,972.95 987.95,972.95 1016.33,1001.33 1016.33,1077.27 1006.82,1077.27 960,1030.45 960,984.88
  pour cut-out: 1006.71,757.07 1066.98,757.07 1071.75,761.85 1071.75,643.25 1010.49,643.25 1004.17,649.58 1004.17,760.25
  pour cut-out: 2045,1391.22 2073.58,1391.22 2079.79,1385 2072.94,1378.15 2072.94,1310 2071.69,1310 2042.01,1339.68 2070,1367.67 2070,1380
  pour cut-out: 1565.06,1365 1601.82,1365 1600,1363.18 1600,1312.76 1590.74,1312.76 1564,1339.49 1564,1361.87
  pour cut-out: 605.96,596.23 503.99,494.25 503.99,492.08 638.41,492.08 638.41,575.56 643.81,575.56 663.4,595.15 662.32,596.23
  pour cut-out: 364.93,594.07 321.22,550.35 321.22,497.69 278.7,455.17 278.7,447.6 280.77,445.53 282.37,447.12 333.95,447.12 333.95,555.18 375,596.23
  pour cut-out: 674.43,581.06 659.99,566.62 659.99,482.97 674.68,468.28 674.68,466.53 679.33,466.53 709.31,436.55 711.39,438.62 714.31,438.62 714.31,463.29 674.64,502.97 679.33,576.16 682.62,582.22
  pour cut-out: 1199.49,851.17 1400.35,851.17 1400.35,648.36 1400,648.01 1388.01,660 1199.49,660
  pour cut-out: 880.1,1100.8 880.1,980.54 931.47,980.54 931.47,1102.77 878.13,1102.77
  pour cut-out: 884.32,840.68 884.32,720.42 935.68,720.42 935.68,842.65 882.35,842.65
  pour cut-out: 361.38,481 361.38,360.73 412.75,360.73 412.75,482.97 359.41,482.97
  pour cut-out: 448.61,481 448.61,360.73 499.99,360.73 499.99,482.97 446.65,482.97
  pour cut-out: 535.85,481 535.85,360.73 587.22,360.73 587.22,482.97 533.88,482.97
  pour cut-out: 623.09,481 623.09,360.73 674.46,360.73 674.46,482.97 621.12,482.97
  pour cut-out: 714.31,479.15 714.31,358.88 765.68,358.88 765.68,481.12 712.35,481.12
  pour cut-out: 797.57,481 797.57,360.73 848.94,360.73 848.94,482.97 795.6,482.97
  pour cut-out: 880.1,1100.8 880.1,980.54 931.47,980.54 931.47,1102.77 878.13,1102.77
  pour cut-out: 884.32,840.68 884.32,720.42 935.68,720.42 935.68,842.65 882.35,842.65
  pour cut-out: 797.16,1354.15 797.16,1233.88 848.53,1233.88 848.53,1356.12 795.19,1356.12
  pour cut-out: 710,1354.15 710,1233.88 761.37,1233.88 761.37,1356.12 708.03,1356.12
  pour cut-out: 622.85,1354.15 622.85,1233.88 674.22,1233.88 674.22,1356.12 620.88,1356.12
  pour cut-out: 535.69,1354.15 535.69,1233.88 587.06,1233.88 587.06,1356.12 533.72,1356.12
  pour cut-out: 448.53,1354.15 448.53,1233.88 499.9,1233.88 499.9,1356.12 446.56,1356.12
  pour cut-out: 2427.29,840 2428.03,839.26 2428.03,804.37 2486.32,804.37 2489.69,807.74 2489.69,831.52 2431.49,831.52 2425,838.01
  pour cut-out: 2426.18,1229.57 2429.88,1225.87 2429.88,1167.12 2560.12,1167.12 2560.12,1226.49 2432.65,1226.49 2428.4,1230.75
  pour cut-out: 2425.41,1141.48 2429.11,1137.78 2429.11,1079.03 2559.35,1079.03 2559.35,1138.4 2431.89,1138.4 2427.64,1142.66
  pour cut-out: 2426.18,1054.92 2429.88,1051.22 2429.88,992.48 2560.12,992.48 2560.12,1051.85 2432.65,1051.85 2428.4,1056.1
  pour cut-out: 2426.18,967.6 2429.88,963.9 2429.88,905.16 2560.12,905.16 2560.12,964.53 2432.65,964.53 2428.4,968.78
  pour cut-out: 2426.18,561.06 2429.88,557.36 2429.88,498.62 2560.12,498.62 2560.12,557.99 2432.65,557.99 2428.4,562.24
  pour cut-out: 2426.18,646.83 2429.88,643.13 2429.88,584.39 2560.12,584.39 2560.12,643.76 2432.65,643.76 2428.4,648.01
  pour cut-out: 2426.18,732.6 2429.88,728.9 2429.88,670.16 2560.12,670.16 2560.12,729.53 2432.65,729.53 2428.4,733.78
  pour cut-out: 1755.19,777.9 1742.52,765.23 1742.52,636.71 1747.29,641.49 1992.16,641.49 1992.16,780.8 1990.06,782.9 1989.34,782.18 1751.69,782.18
  pour cut-out: 1754.23,776.64 1755,775.87 1755,636.49 1817.16,636.49 1815.06,638.58 1815.06,777.9 1755.19,777.9 1754.23,776.93
  pour cut-out: 1839.23,776.64 1840,775.87 1840,636.49 1902.16,636.49 1900.06,638.58 1900.06,777.9 1840.19,777.9 1839.23,776.93
  pour cut-out: 1929.23,781.64 1930,780.87 1930,641.49 1992.16,641.49 1990.06,643.58 1990.06,782.9 1930.19,782.9 1929.23,781.93
  pour cut-out: 1929.23,490.59 1930,489.82 1930,350.44 1992.16,350.44 1990.06,352.53 1990.06,491.85 1930.19,491.85 1929.23,490.88
  pour cut-out: 1849.23,490.6 1850,489.82 1850,350.44 1912.16,350.44 1910.06,352.54 1910.06,491.85 1850.19,491.85 1849.23,490.89
  pour cut-out: 1759.23,1072.7 1760,1071.92 1760,932.54 1822.16,932.54 1820.06,934.64 1820.06,1073.95 1760.19,1073.95 1759.23,1072.99
  pour cut-out: 1504.23,1067.69 1505,1066.92 1505,927.54 1567.16,927.54 1565.06,929.63 1565.06,1068.95 1505.19,1068.95 1504.23,1067.98
  pour cut-out: 1409.23,1363.74 1410,1362.97 1410,1223.59 1472.16,1223.59 1470.06,1225.68 1470.06,1365 1410.19,1365 1409.23,1364.04
  pour cut-out: 1504.23,1363.74 1505,1362.97 1505,1223.59 1567.16,1223.59 1565.06,1225.68 1565.06,1365 1505.19,1365 1504.23,1364.03
  pour cut-out: 1929.23,1363.74 1930,1362.97 1930,1223.59 1992.16,1223.59 1990.06,1225.68 1990.06,1365 1930.19,1365 1929.23,1364.03
  pour cut-out: 1844.23,1363.74 1845,1362.97 1845,1223.59 1907.16,1223.59 1905.06,1225.68 1905.06,1365 1845.19,1365 1844.23,1364.03
  pour cut-out: 1764.23,1363.74 1765,1362.97 1765,1223.59 1827.16,1223.59 1825.06,1225.68 1825.06,1365 1765.19,1365 1764.23,1364.03
  pour cut-out: 1751.74,940.38 1779.13,940.38 1779.13,911.37 1776.58,908.82 1752.28,908.82 1752.28,930.95 1755,933.67
  pour cut-out: 1739.72,1002.91 1764.31,1002.91 1764.31,942.99 1759.11,937.78 1761.71,935.18 1780,935.18 1780,927.98 1772.28,920.27 1772.23,920.32 1736.17,920.32 1736.17,999.36
  pour cut-out: 1926.99,1073.75 1925,1071.76 1925,933.67 1995.35,933.67 1992.34,936.68 1992.34,1071.24 1929.81,1071.24 1926.99,1074.07
  pour cut-out: 1840.14,1075.12 1845.31,1069.95 1845.31,938.83 1904.68,938.83 1908.01,942.16 1908.01,1070.12 1845.72,1070.12 1841.77,1074.07
  pour cut-out: 1755,1069.29 1819.89,1069.29 1825,1064.19 1825,934.84 1756.17,934.84 1759.11,937.78 1759.11,1064.89 1842.97,1064.89 1819.89,1064.19
  pour cut-out: 352.78,1135 352.78,613.33 347.94,608.49 360.2,596.23 860.91,596.23 860.91,1126.71 864.19,1130 853.16,1141.03 365,1141.03
  pour cut-out: 1651.27,493.82 1651.27,351.66 1644.62,345 1647.67,341.95 1827.16,341.95 1827.16,491.93 1820.63,498.46 1657.24,498.46
  pour cut-out: 1569.64,785 1581.67,772.97 1581.67,636.71 1742.52,636.71 1749.56,643.76 1745,648.32 1745,784.84 1744.84,785
  pour cut-out: 1590,1065.29 1594.19,1061.1 1594.19,920.32 1759.11,920.32 1740.46,938.97 1740.46,1080.46 1603.83,1080.46 1588.66,1065.29
  pour cut-out: 1585,1360.56 1595,1350.56 1595,1219.98 1749.56,1219.98 1755,1225.42 1751.74,1228.67 1751.74,1360 1596.06,1360 1592.32,1363.74
  pour cut-out: 1505,782.11 1501.99,779.09 1501.99,639.46 1644.62,639.46 1651.27,646.12 1645,652.39 1645,779.51 1506.8,779.51 1505.31,778.02
  pour cut-out: 2072.5,655.69 2065,648.19 2065,348.01 2376.99,348.01 2380,351.03 2371.34,359.69 2371.34,650 2087.09,650 2077.5,659.59
  pour cut-out: 2067.5,651.78 2070,649.28 2070,338.89 2371.26,338.89 2377.37,345 2371.34,351.03 2371.34,650 2087.09,650 2077.5,659.59
  pour cut-out: 2070,1002.91 2067.5,1000.41 2067.5,701.93 2367.89,701.93 2374.78,708.82 2374.78,1012.76 2082.08,1012.76 2077.5,1008.19
  pour cut-out: 2065,1385 2070,1380 2070,1055 2354.18,1055 2360,1060.82 2360,1366.97 2081.82,1366.97 2060,1388.78
  pour cut-out: 1039.1,1525.26 1031.28,1517.44 1031.28,1220.77 1332.07,1220.77 1340,1212.84 1347.14,1219.98 1347.14,1521.42 1043.84,1521.42 1040,1525.26
  pour cut-out: 1031.28,1530 1031.28,1236.28 1046.91,1220.64 1049.16,1222.89 1325.93,1222.89 1325.93,1512.84 1308.76,1530
  pour cut-out: 2076.32,645.83 2076.32,364.26 2070,357.94 2072.94,355 2360,355 2360,638.01 2350.01,648.01 2095,648.01
  pour cut-out: 2085.79,997.02 2085.79,730.79 2080,725 2088.44,716.56 2355,716.56 2355,1003.19 2350.01,1008.19 2086.39,1008.19
  pour cut-out: 2086.22,1273.24 2120.37,1273.24 2120.37,1162.82 2076.32,1162.82 2075,1161.49 2075,1079.07 2080,1074.07 2086.39,1080.46 2340,1080.46 2340,1161.58 2341.24,1162.82 2309.63,1162.82 2309.63,1273.24 2311.62,1275.23 2355,1275.23 2355,1361.12 2353.88,1360 2085.36,1360 2085.36,1274.1
Bottom Layer:
  pour cut-out: 1055,350 1035,350 966.54,418.46 1083.99,418.46 1040,374.47 1010,374.47 1010,376.04 967.57,418.46

## Silkscreen, mask and mechanical layers (free items; w line width, h text height)
Top Overlay:
  text "RL" at 195,1285 h30 r90
  text "REF" at 195,1180 h30 r90
  text "DRDY" at 970,1076.1 h20 r90
  text "IN8" at 195,1070 h30 r90
  text "5V" at 1180,990 h30 r90
  text "IN7" at 195,980 h30 r90
  text "DOUT" at 970,970 h20 r90
  text "IN6" at 195,880 h30 r90
  text "SCLK" at 970,870 h20 r90
  text "CS" at 970,791.54 h20 r90
  text "IN5" at 195,780 h30 r90
  text "IN4" at 195,680 h30 r90
  text "START" at 970,660 h20 r90
  text "3.3V" at 1180,660 h30 r90
  text "GND" at 1450,660 h30 r90
  text "DIN" at 970,585 h20 r90
  text "IN3" at 195,580 h30 r90
  text "IN2" at 195,480 h30 r90
  text "RESET" at 970,465 h20 r90
  text "IN1" at 195,380 h30 r90
  text "PWDN" at 970,365 h20 r90
Bottom Overlay:
  drawing of 6511 lines, arcs and shapes, not listed
Mechanical 1:
  the board outline again, w10

## Dimensions
0,0 to 0,1771.65 on Mechanical 1
0,0 to 2755.91,0 on Mechanical 1